# Allegro board 1010403-900-0012_rev-a.brd
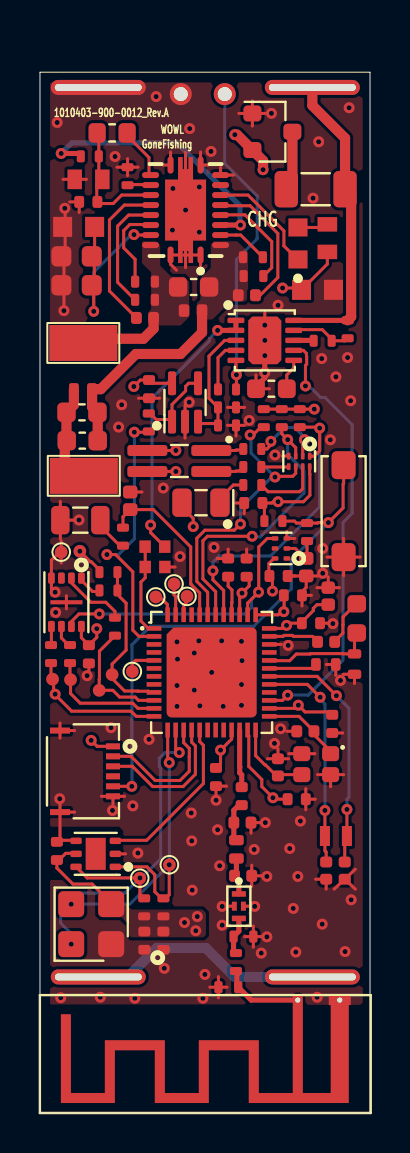
[diagram p0: board, top side]
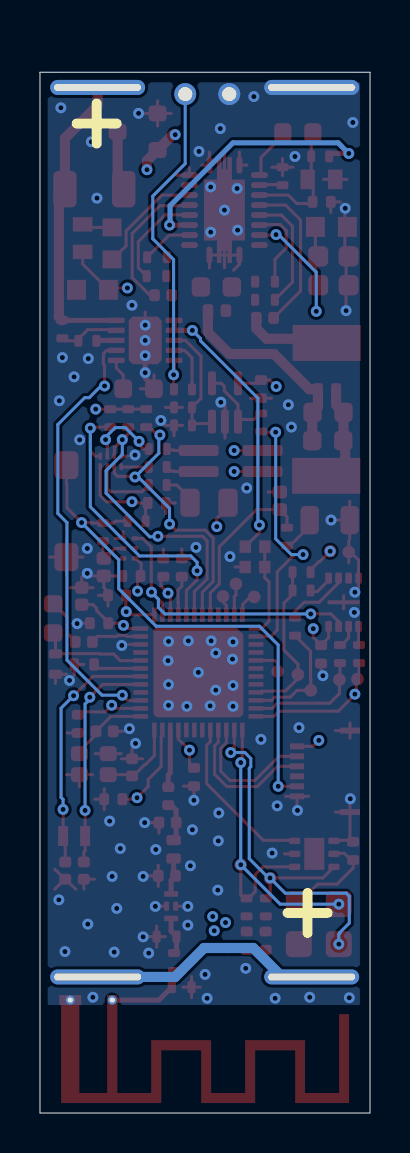
[diagram p1: board, bottom side, seen from below]

Outline 16.51 x 52.07 mm; copper layers: TOP, L2 - GND, L3 - POWER, BOTTOM. Coordinates in mm from the lower left corner of the outline.
Outline path: 0,52.07 0,0 16.51,0 16.51,52.07 0,52.07

## Design rules (mm)
constraint set DEFAULT: min track width 0.152

## Placement (name value [footprint] x y rotation side)
ANT1  Antenna_AN043  [PCBANTENNA_AN043]  8.27 3.2 180 top
B1  HHR70AAAB8T  [PANASONIC_HHR70AAAB8T]  13.62 29.06 90 bottom
B2  HHR70AAAB8T  [PANASONIC_HHR70AAAB8T]  2.92 29.06 270 bottom
C1  0.1uF  [CAPC100X50X55L20N]  0.85 13.11 90 top
C2  10uF  [CAPC100X50X90L25N]  13.32 27.31 270 top
C3  0.1uF  [CAPC100X50X55L20N]  11.93 26.87 0 top
C4  0.1uF  [CAPC100X50X55L20N]  6.17 8.62 270 top
C5  0.1uF  [CAPC100X50X55L20N]  12.65 25.9 0 top
C6  4.7uF  [CAPC100X50X80L25N]  14.42 25.86 90 top
C7  0.1uF  [CAPC100X50X55L20N]  8.8 16.81 270 top
C8  0.1uF  [CAPC100X50X55L20N]  14.62 19.47 270 top
C9  4.7uF  [CAPC102X52X65L15N]  15.73 22.46 270 top
C10  0.1uF  [CAPC100X50X55L20N]  2.45 22.95 270 top
C11  10uF  [CAPC100X50X90L25N]  4.51 30.63 90 top
C12  0.1uF  [CAPC100X50X55L20N]  10.34 27.28 270 top
C13  0.1uF  [CAPC100X50X55L20N]  9.41 27.29 90 top
C14  0.1uF  [CAPC100X50X55L20N]  12.84 15.7 0 top
C15  0.1uF  [CAPC100X50X55L20N]  13.55 24.51 180 top
C16  3.4pF  [CAPC100X50X55L22N]  10.09 15.85 270 top
C17  0.22uF  [CAPC100X50X60L15N]  14.3 22.44 0 top
C18  1.2pF  [CAPC100X50X55L25N]  10.13 14.53 0 top
C19  0.5pF  [CAPC100X50X55L25N]  10.16 11.87 0 top
C20  DNP  [CAPC100X50X55L15N]  10.18 8.83 0 top
C21  DNP  [CAPC100X50X55L15N]  9.42 6.3 180 top
C22  22nF  [CAPC100X50X55L25N]  10.35 40.91 0 top
C23  12pF  [CAPC100X50X55L25N]  13.28 19.1 180 top
C24  12pF  [CAPC100X50X55L25N]  11.9 17.29 90 top
C25  22nF  [CAPC100X50X55L25N]  5.25 39.78 180 top
C26  0.47uF  [CAPC100X50X55L15N]  10.68 41.87 0 top
C27  12pF  [CAPC100X50X55L25N]  15.25 12.13 90 top
C28  12pF  [CAPC100X50X55L25N]  14.32 12.13 90 top
C32  15nF  [CAPC160X80X90L35N]  11.58 36.23 180 top
C40  0.1uF  [CAPC100X50X55L20N]  5.45 36.22 90 top
C41  1uF  [CAPC1608X94N]  13.88 41.18 0 top
C42  0.1uF  [CAPC100X50X55L20N]  5.22 8.62 270 top
C43  0.1uF  [CAPC100X50X55L20N]  10.67 30.52 0 top
C44  0.47uF  [CAPC100X50X55L15N]  5.25 40.68 180 top
C45  10nF  [CAPC100X50X55L15N]  10.65 42.81 0 top
C46  10nF  [CAPC100X50X55L15N]  5.25 41.59 180 top
C47  68nF  [CAPC160X80X87L35N]  2.1 35.06 0 top
C48  68nF  [CAPC160X80X87L35N]  2.11 33.64 0 top
C49  47nF  [CAPC100X50X55L20N]  2.15 36.21 0 top
C50  1.8nF  [CAPC100X50X56L25N]  7.66 40.14 180 top
C51  100pF  [CAPC160X80X87L35N]  7.69 41.33 180 top
C52  0.1uF  [CAPC1608X94N]  1.93 44.33 180 top
C53  10uF  [CAPC160X80X100L37N]  1.83 41.41 180 top
C54  10uF  [CAPC160X80X100L37N]  1.83 42.86 180 top
C55  0.1uF  [CAPC100X50X55L20N]  2.42 45.58 180 top
D1  Green  [LEDC200X125X120L40N]  8.05 30.53 180 top
D2  Red/Yel  [SUNLED_XZM2CRKCYK55W-8]  6.97 32.62 0 top
D3  GRN  [LEDC1608X80N]  12.91 43.5 90 top
F1  SF-1206SP200M-2  [FUSC320X160X117L51N]  13.79 46.22 0 top
J1  503480-0600  [MOLEX_503480-0600]  0.35 17.09 270 top
L1  3.3nH  [INDC100X60X60L20N]  9.83 13.19 270 top
L2  22nH  [INDC100X50X55L25N]  14.32 23.57 0 top
L3  10uH  [INDC160X80X90L35N]  15.85 24.75 270 top
NOREF  -  []  0 0 0 top
NOREF#2  -  []  16.51 0 90 top
NOREF#3  -  []  0 0 0 top
NOREF#4  -  []  -4.58 17.4 0 top
NOREF#5  -  []  0 0 0 top
Q2  DMP2035U-7  [SOT23-3P91_240X120L53X44]  11.63 49.09 270 top
R1  DNP  [RESC205X125X50L35N]  2.02 29.66 0 top
R2  100K  [RESC100X50X40L25]  11.68 29.61 180 top
R3  4.99K  [RESC100X50X40L25]  13.36 29.06 270 top
R4  4.99K  [RESC100X50X40L25]  4.15 28.84 270 top
R5  140  [RESC1609X50N]  2.43 46.71 0 top
R6  0  [RESC100X50X40L25]  9.8 7.55 270 top
R7  33  [RESC100X50X40L25]  0.55 22.96 90 top
R8  33  [RESC100X50X40L25]  1.5 22.96 90 top
R9  33  [RESC100X50X40L25]  3.75 24.33 90 top
R10  10K  [RESC100X50X40L25]  9.36 35.3 0 top
R11  1M  [RESC100X50X40L25]  3.43 27.06 180 top
R12  33  [RESC100X50X40L25]  3.43 26.14 180 top
R13  DNP  [RESC100X50X40L25]  2.49 47.86 180 top
R14  10K  [RESC100X50X40L25]  4.38 46.87 270 top
R15  357  [RESC155X85X50L30N]  3.61 49.03 180 top
R16  1.5K  [RESC1609X50N]  14.38 43.77 270 top
R17  1M  [RESC1005X40N]  5.76 27.32 180 top
R19  10K  [RESC100X50X40L25]  9.36 34.4 0 top
R20  1M  [RESC1005X40N]  5.75 28.33 0 top
R22  100  [RESC100X50X40L25]  10.62 31.42 180 top
R26  10K  [RESC100X50X40L25]  5.45 34.55 90 top
R30  140K  [RESC100X50X40L25]  15.39 39.21 90 top
R31  100K  [RESC100X50X40L25]  14.14 38.63 0 top
R33  10K  [RESC100X50X40L25]  9.36 36.2 180 top
R34  100  [RESC100X50X40L25]  10.62 32.32 180 top
R35  1M  [RESC100X50X40L25]  13 34.76 270 top
R36  1M  [RESC100X50X40L25]  12.1 34.76 270 top
R37  1M  [RESC100X50X40L25]  11.2 34.76 270 top
R39  100  [RESC100X50X40L25]  10.62 33.22 180 top
R44  4.02K  [RESC100X50X40L25]  5.21 10.29 90 top
R45  4.02K  [RESC100X50X40L25]  6.18 10.29 90 top
RT2  10K  [THRMRB220W45L300T300H950]  8.14 50.98 180 bottom
SW1  MK24-A-3  [STANDEX_MK24-A-3]  15.19 30.11 90 top
TP1  DNP  [TP_C0635]  7.36 25.85 0 top
TP2  DNP  [TP_C0635]  6.7 26.47 0 top
TP3  DNP  [TP_C0635]  5.79 25.82 0 top
TP7  DNP  [TP_C0635]  0.63 21.7 180 top
TP8  DNP  [TP_C0635]  1.53 21.68 180 top
TP9  DNP  [TP_C0635]  2.96 21.15 180 top
TP10  DNP  [TP_C0635]  1.06 28.06 90 top
TP11  DNP  [TP_C0635]  1.99 28.11 270 top
TP12  DNP  [TP_C0635]  3.61 21.93 180 top
TP23  DNP  [TP_C0635]  6.47 12.42 180 top
TP24  DNP  [TP_C0635]  4.99 11.75 0 top
TP27  DNP  [TP_C0635]  4.62 22.09 90 top
TP28  5015  [TP340X180N]  2.19 31.88 180 top
TP29  5015  [TP340X180N]  2.17 38.52 180 top
U1  TMP117AIDRVR  [SON7P65_200X200X80L25X30T160X100N]  2.79 12.97 90 top
U2  MS583730BA01-50  [ICDFN4_330X330X285L130X130]  2.56 9.45 180 top
U3  DLF162500LT-5028A1  [TDK_DLF162500LT-5028A1]  9.95 10.35 270 top
U4  SN74LVC1G07QDRYRQ1  [PSON6P50_145X100X55L30X20N]  12.05 28.24 90 top
U5  BLUENRG-355MT  [QFN49P40_600X600X105L40X21T450N]  8.59 22.04 270 top
U6  MX25R1635FZUIH0  [PSON9P50_200X300X60L40X25T160X20N]  1.32 25.55 180 top
U7  LTC4079EDD#TRPBF  [SON11P50_300X300X80L40X25T238X165N]  11.25 38.65 270 top
U8  BQ51013ARHLR  [QFN50P450X350X100-21N]  7.28 45.17 90 top
U9  LPV521MG/NOPB  [SOT23-5P65_210X110L36X22N]  7.26 35.55 0 top
U10  74LVC3G07GS  [PSON8P35_135X100X35L31X16N]  12.97 32.6 180 top
Y2  32MHz  [OSCCC200X160X46-4NA]  13.82 17.45 180 top
Y4  32.768kHz  [DFN160X100X50-2NA]  14.8 13.86 0 top

## Library data of the parts
ANT1 = Antenna_Shunt
B1 B2 = BATTERY_CELL-1
C1-C28 C32 C40-C55 = CAP
D1 D3 = LED_CA
D2 = LED_BI-Color_RY
F1 = FUSE
J1 = Header_6-Pin_M2
L1-L3 = IND
Q2 = MOSFET_P-CH_GSD
R1-R17 R19 R20 R22 R26 R30 R31 R33-R37 R39 R44 R45 = RES
RT2 = Thermistor
SW1 = Reed_SPST_NO
TP1-TP3 TP7-TP12 TP23 TP24 TP27-TP29 = TESTPOINT
U1 = TMP117AIDRVR
U2 = MS583730BA01-50
U3 = DLF162500LT-5028A1
U4 = Buffer_1X_6P_OD
U5 = BLUENRG-355MT
U6 = MX25R1635FZUIH0
U7 = LTC4079
U8 = BQ51013ARHL
U9 = AMP_1X_5P
U10 = Buffer_3X_8P_OD
Y2 = XTAL1-3_Case2-4
Y4 = XTAL1-2: alternate symbols: (ABS05)

## Footprints (pads in the part's own frame, mm; a bottom-side part is the same pattern mirrored in y, then rotated)
CAPC100X50X55L15N
  rrect 0.41x0.6 smd: 1(-0.495,0) 2(0.495,0)
CAPC100X50X55L20N
  rrect 0.49x0.6 smd: 1(-0.455,0) 2(0.455,0)
CAPC100X50X55L22N
  rrect 0.5x0.6 smd: 1(-0.45,0) 2(0.45,0)
CAPC100X50X55L25N
  rrect 0.54x0.6 smd: 1(-0.43,0) 2(0.43,0)
CAPC100X50X56L25N
  rrect 0.53x0.63 smd: 1(-0.45,0) 2(0.45,0)
CAPC100X50X60L15N
  rrect 0.48x0.63 smd: 1(-0.495,0) 2(0.495,0)
CAPC100X50X80L25N
  rrect 0.62x0.67 smd: 1(-0.425,0) 2(0.425,0)
CAPC100X50X90L25N
  rrect 0.64x0.72 smd: 1(-0.44,0) 2(0.44,0)
CAPC102X52X65L15N
  rrect 0.46x0.67 smd: 1(-0.51,0) 2(0.51,0)
CAPC160X80X87L35N
  rrect 0.92x0.97 smd: 1(-0.775,0) 2(0.775,0)
CAPC160X80X90L35N
  rrect 0.89x0.93 smd: 1(-0.77,0) 2(0.77,0)
CAPC160X80X100L37N
  rrect 1x1.02 smd: 1(-0.76,0) 2(0.76,0)
CAPC1608X94N
  rect 0.95x1 smd: 1(-0.8,0) 2(0.8,0)
DFN160X100X50-2NA
  rect 0.5x1 smd: 1(-0.55,0) 2(0.55,0)
FUSC320X160X117L51N
  rrect 1.17x1.82 smd: 1(-1.47,0) 2(1.47,0)
ICDFN4_330X330X285L130X130
  rrect 1.3x1.3 smd: 1(-1,1) 2(-1,-1) 3(1,-1) 4(1,1)
INDC100X50X55L25N
  rrect 0.54x0.6 smd: 1(-0.43,0) 2(0.43,0)
INDC100X60X60L20N
  rrect 0.51x0.73 smd: 1(-0.46,0) 2(0.46,0)
INDC160X80X90L35N
  rrect 0.87x0.929 smd: 1(-0.73,0) 2(0.73,0)
LEDC200X125X120L40N
  rrect 0.97x1.42 smd: 1(-0.95,0) 2(0.95,0)
LEDC1608X80N
  rect 0.9x0.95 smd: 1(-0.8,0) 2(0.8,0)
MOLEX_503480-0600
  rect 0.3x0.7 smd: 1(-1.25,3.3) 2(-0.75,3.3) 3(-0.25,3.3) 4(0.25,3.3) 5(0.75,3.3) 6(1.25,3.3)
  rect 0.3x1 smd: M1(-2.04,0.65) M2(2.04,0.65)
OSCCC200X160X46-4NA
  rrect 0.85x0.75 smd: 1(-0.72,-0.525) 2(0.72,-0.525) 3(0.72,0.525) 4(-0.72,0.525)
PANASONIC_HHR70AAAB8T
  oval 0.75x4.75 hole 0.35x4.35: 1(22.25,0) 2(-22.25,0)
PCBANTENNA_AN043
  round 0.457 hole 0.254: 1(-6.725,-2.45) 2(-4.625,-2.45)
PSON6P50_145X100X55L30X20N
  rrect 0.22x0.33 smd: 1(-0.5,-0.295) 2(0,-0.295) 3(0.5,-0.295) 4(0.5,0.295) 5(0,0.295) 6(-0.5,0.295)
PSON8P35_135X100X35L31X16N
  rrect 0.18x0.35 smd: 1(-0.525,-0.26)
  rrect 0.18x0.34 smd: 2(-0.175,-0.265) 3(0.175,-0.265) 4(0.525,-0.265) 5(0.525,0.265) 6(0.175,0.265) 7(-0.175,0.265) 8(-0.525,0.265)
PSON9P50_200X300X60L40X25T160X20N
  rrect 0.34x0.56 smd: 1(-0.75,-1.21) 2(-0.25,-1.21) 3(0.25,-1.21) 4(0.75,-1.21) 5(0.75,1.21) 6(0.25,1.21) 7(-0.25,1.21) 8(-0.75,1.21)
  rect 1.6x0.2 smd: 9(0,0)
QFN49P40_600X600X105L40X21T450N
  rect 0.228x0.735 smd: 1(-2.2,-2.882) 2(-1.8,-2.882) 3(-1.4,-2.882) 4(-1,-2.882) 5(-0.6,-2.882) 6(-0.2,-2.882) 7(0.2,-2.882) 8(0.6,-2.882) 9(1,-2.882) 10(1.4,-2.882) 11(1.8,-2.882) 12(2.2,-2.882) 25(2.2,2.882) 26(1.8,2.882) 27(1.4,2.882) 28(1,2.882) 29(0.6,2.882) 30(0.2,2.882) 31(-0.2,2.882) 32(-0.6,2.882) 33(-1,2.882) 34(-1.4,2.882) 35(-1.8,2.882) 36(-2.2,2.882)
  rect 0.735x0.228 smd: 13(2.882,-2.2) 14(2.882,-1.8) 15(2.882,-1.4) 16(2.882,-1) 17(2.882,-0.6) 18(2.882,-0.2) 19(2.882,0.2) 20(2.882,0.6) 21(2.882,1) 22(2.882,1.4) 23(2.882,1.8) 24(2.882,2.2) 37(-2.882,2.2) 38(-2.882,1.8) 39(-2.882,1.4) 40(-2.882,1) 41(-2.882,0.6) 42(-2.882,0.2) 43(-2.882,-0.2) 44(-2.882,-0.6) 45(-2.882,-1) 46(-2.882,-1.4) 47(-2.882,-1.8) 48(-2.882,-2.2)
  custom 4.5x4.5 smd: 49(0,0)
QFN50P450X350X100-21N
  oval 0.85x0.3 smd: 1(-2.25,-0.75) 10(2.25,-0.75) 11(2.25,0.75) 20(-2.25,0.75)
  oval 0.3x0.85 smd: 2(-1.75,-1.75) 3(-1.25,-1.75) 4(-0.75,-1.75) 5(-0.25,-1.75) 6(0.25,-1.75) 7(0.75,-1.75) 8(1.25,-1.75) 9(1.75,-1.75) 12(1.75,1.75) 13(1.25,1.75) 14(0.75,1.75) 15(0.25,1.75) 16(-0.25,1.75) 17(-0.75,1.75) 18(-1.25,1.75) 19(-1.75,1.75)
  custom 5.3x2.05 smd: 21(0,0)
RESC100X50X40L25
  rrect 0.4x0.6 smd: 1(-0.45,0) 2(0.45,0)
RESC155X85X50L30N
  rrect 0.86x0.98 smd: 1(-0.75,0) 2(0.75,0)
RESC205X125X50L35N
  rrect 0.92x1.42 smd: 1(-1,0) 2(1,0)
RESC1005X40N
  rect 0.57x0.62 smd: 1(-0.49,0) 2(0.49,0)
RESC1609X50N
  rect 0.72x0.98 smd: 1(-0.69,0) 2(0.69,0)
SON7P65_200X200X80L25X30T160X100N
  rrect 0.32x0.565 smd: 1(-0.65,-0.982) 2(0,-0.982) 3(0.65,-0.982) 4(0.65,0.982) 5(0,0.982) 6(-0.65,0.982)
  rect 1.6x1 smd: 7(0,0)
SON11P50_300X300X80L40X25T238X165N
  rrect 0.27x0.84 smd: 1(-1,-1.445) 2(-0.5,-1.445) 3(0,-1.445) 4(0.5,-1.445) 5(1,-1.445) 6(1,1.445) 7(0.5,1.445) 8(0,1.445) 9(-0.5,1.445) 10(-1,1.445)
  rrect 2.38x1.65 smd: 11(0,0)
SOT23-3P91_240X120L53X44
  rrect 0.8x0.9 smd: 1(-0.915,-1) 2(0.915,-1) 3(0,1)
SOT23-5P65_210X110L36X22N
  rrect 0.4x1.19 smd: 1(-0.65,-0.96) 2(0,-0.96) 3(0.65,-0.96) 4(0.65,0.96) 5(-0.65,0.96)
STANDEX_MK24-A-3
  rrect 1.4x1.2 smd: 1(-2.3,0) 2(2.3,0)
SUNLED_XZM2CRKCYK55W-8
  rrect 2x0.55 smd: 1(1.6,0.525) 2(-1.6,0.525) 3(1.6,-0.525) 4(-1.6,-0.525)
TDK_DLF162500LT-5028A1
  rect 0.275x0.7 smd: 1(-0.612,0) 3(0.612,0)
  rect 0.45x0.245 smd: 2(0,-0.228) 4(0,0.228)
THRMRB220W45L300T300H950
  round 1.1 hole 0.7: 1(-1.1,0) 2(1.1,0)
TP340X180N
  rect 3.4x1.8 smd: 1(0,0)
TP_C0635
  round 0.635 smd: 1(0,0)

## Nets
GND_POWER: ANT1.1(GND) B2.2 C1.2 C2.2 C3.2 C4.2 C5.2 C6.2 C7.2 C8.2 C9.2 C10.2 C11.2 C12.1 C13.2 C14.2 C15.1 C17.2 C18.2 C19.2 C20.2 C21.2 C23.2 C24.2 C27.1 C28.1 C32.2 C40.1 C41.2 C42.2 C43.1 C52.2 C53.2 C54.2 C55.2 J1.6 J1.M1 J1.M2 Q2.1 R1.1 R5.1 R10.2 R14.1 R17.1 R19.2 RT2.2 SW1.1 TP10.1(TP) U1.2 U1.4 U2.1 U3.2 U3.4 U4.3 U5.34(VSSSD) U5.49 U6.4 U6.9 U7.11 U8.1 U8.9 U8.10 U8.11 U8.20 U8.21 U9.2(V-) U10.4 Y2.2 Y2.4
VBAT: C1.1 C3.1 C4.1 C5.1 C6.1 C7.1 C8.1 C10.1 C12.2 C14.1 C15.2 C40.2 C42.1 C43.2 D1.2 D2.2 D2.4 J1.1 Q2.2(S) R2.2 R11.2 R35.1 R36.1 R37.1 R44.1 R45.1 TP11.1(TP) U1.5(V+) U2.2(VDD) U4.6 U5.21 U5.23 U5.26 U5.36 U5.37 U5.39 U6.8 U9.5 U10.8
VBAT_IN: B1.1(POS) F1.2 R30.2 U7.10
VDDA: C13.1 U5.40
AC1: C22.1 C26.1 C45.1 C47.2 C48.2 C49.2 C50.1 C51.1 U8.2
AC2: C25.1 C44.1 C46.1 C50.2 C51.2 TP29.1(TP) U8.19
ANALOGSPARE1: TP27.1(TP) U5.5
BLE_NRESET: U4.4(Y) U5.38 U6.7
BLE_SWDCLK: J1.3 U5.16
BLE_SWDIO: J1.2 U5.15
BOOT1: C45.2 U8.3
BOOT2: C46.2 U8.17
CLMP1: C26.2 U8.5
CLMP2: C44.2 U8.16
COM1: C22.2 U8.6
COM2: C25.2 U8.15
DEV1: C11.1 R4.1 U5.44
FOD: C55.1 R5.2 R13.1 R15.2 U8.14
ICHG: R26.1 U5.2
ICHG_NOT_BUFFERED: R10.1 R19.1 U7.3 U9.3
ILIM: R15.1 U8.12
LED1: R35.2 U5.41 U10.1
LED2: R36.2 U5.42 U10.3
LED3: R37.2 U5.43 U10.6
LFSPARE2: TP2.1(TP) U5.47
LFSPARE3: TP1.1(TP) U5.46
LFSPARE4: TP3.1(TP) U5.48
MEM_CS: R11.1 R12.1 TP12.1(TP) U5.9
MEM_SCLK: R8.1 TP8.1(TP) U5.11
MEM_SDI: R7.1 TP7.1(TP) U5.12
MEM_SDO: R9.1 TP9.1(TP) U5.10
NCHG: D3.1(C) U8.7
NCHRG: U5.27 U7.7
NRESET: J1.5 R2.1 R3.1 SW1.2
RECT: C52.1 C53.1 C54.1 U8.18
SCL: R45.2 TP23.1(TP) U1.1 U2.3 U5.13
SDA: R44.2 TP24.1(TP) U1.6 U2.4 U5.14
TALERT: U1.3 U5.17
TS-CTRL: R14.2 U8.13(TS-CTRL)
VCAP: C17.1 U5.31
VCHG: C41.1 R13.2 R16.2 R20.2 U7.1 U7.2 U8.4
N15057205: R12.2 U6.1
N15057239: R8.2 U6.6
N15057265: R7.2 U6.5
N15057295: R9.2 U6.2
N15069355: F1.1 Q2.3
N15069411: B1.2 B2.1(POS)
N15070172: R30.1 R31.2 U7.9
N15070236: R31.1 U7.8
N15070276: C32.1 U7.6(TIMER)
N15070284: R33.2 U7.4
N15070288: R33.1 RT2.1(C1) U7.5
N15130755: R26.2 U9.1 U9.4
N15156716: C47.1 C48.1 C49.1 TP28.1(TP)
N15160261: D3.2 R16.1
N15172554: R34.1 U10.5
N15172558: R39.1 U10.2(3Y)
N15173046: D2.3(C-YEL) R34.2
N15173050: D2.1 R39.2
N15197976: D1.1(C) R22.2
N15197980: R22.1 U10.7
N15217382: C2.1 R3.2 U4.2
N15228069: C16.1 U5.22
N15230394: C27.2 U5.30 Y4.2
N15230398: C28.2 U5.29 Y4.1
N15231077: C23.1 U5.25 Y2.1
N15231081: C24.1 U5.24 Y2.3(OUTPUT)
N15253808: C9.1 L3.2 U5.32
N15257122: R17.2 R20.1 U5.1
N15277400: R1.2 R4.2
N15288589: L2.1 U5.35
N15293933: L2.2 L3.1
N15294382: C16.2 C18.1 L1.1
N15294859: C19.1 L1.2 U3.1
N15294866: C20.1 R6.1 U3.3(OUT)
N15294875: ANT1.2 C21.1 R6.2

Pads without a net: J1 4; U1 7; U4 1 5; U5 3 4 6 7 8 18 19 20 28 33 45; U6 3; U8 8

## Via types
v1: diameter 0.546, hole 0.254, TOP to BOTTOM, 152 vias

## Routing (per net, layer and track width the routed paths; a pad name or vN(x,y) marks a point on that pad's centre or on a via; arc(x,y) is an arc through that point)
GND_POWER: length 83.2
  TOP w0.152: 7.28,42.3 v1(7.28,45.17) 7.28,48.05 ; 3.07,15.84 J1.6 ; J1.6 3.65,15.47 ; J1.6 4.23,15.84 ; SW1.1 15.19,28.74 ; SW1.1 14.36,27.81 ; SW1.1 16.02,27.81 ; SW1.1 15.19,26.88 ; v1(0.76,26.06) 0.57,26.24 U6.4 0.57,27.66 0.97,28.06 TP10.1 ; 14.54,16.33 Y2.4 ; Y2.4 15.19,16.93 ; Y2.4 13.88,16.93 ; C3.2 12.73,26.87 12.73,26.87 C2.2 ; 1.02,28.72 R1.1 ; R1.1 1.02,30.6 ; R1.1 1.71,29.66 ; 13.75,17.98 Y2.2 12.44,17.98 ; 8.03,42.27 U8.1 U8.20 6.53,42.46 6.83,42.16 ; C24.2 12.43,17.72 ; C24.2 11.9,18.22 ; C24.2 11.38,17.72 ; J1.M2 1.73,15.05 ; J1.M2 1,13.72 C1.2 1.02,13.57 1.1,13.64 1.78,13.64 U1.4 ; J1.M2 1,15.43 ; 9.37,10.35 U3.2 ; 10.24,8.83 C20.2 ; C20.2 11.11,8.83 ; C20.2 10.67,9.36 ; C20.2 10.67,8.3 ; 11.06,14.53 C18.2 10.56,14 ; 9.41,28.21 C13.2 8.88,27.74 ; 10.52,34.55 10.46,34.6 v1(10.46,34.65) ; 7.26,35.41 U9.2 7.26,33.76 ; 8.02,47.43 U8.10 ; U8.10 8.03,48.08 ; U8.10 8.41,47.42 ; 4.38,46.89 R14.1 ; R14.1 3.85,47.32 ; R14.1 4.38,47.75 ; R14.1 4.91,47.32 ; C21.2 9.36,6.3 ; C21.2 8.49,6.3 ; C21.2 8.93,6.82 ; C21.2 8.93,5.77 ; C14.2 13.77,15.7 ; C14.2 13.3,16.23 ; C14.2 13.3,15.17 ; 1.32,25.88 U6.9 1.32,25.22 ; 12.35,19.1 C23.2 ; U5.34 12.07,23.44 ; 9.38,35.3 R10.2 10.24,35.3 ; C27.1 15.77,11.2 ; C27.1 15.77,12.2 ; C27.1 14.72,11.2 ; 8.8,15.88 C7.2 9.33,16.35 ; C6.2 14.42,26.82 ; C6.2 14.98,26.28 ; C6.2 13.86,26.28 ; C5.2 13.11,26.08 13.32,26.29 C2.2 ; C5.2 13.11,25.37 ; C5.2 13.58,25.9 ; 6.53,48.08 U8.11 6.15,47.42 ; C2.2 13.91,26.87 ; 9.95,50.01 Q2.1 ; Q2.1 11.3,50.01 ; Q2.1 10.63,49.38 ; Q2.1 10.63,50.64 ; C12.1 10.34,28.21 ; C32.2 11.48,36.23 ; J1.M1 1,19.51 ; J1.M1 1.73,19.13 ; J1.M1 1,18.76 ; R17.1 6.76,27.32 ; 15.17,21.95 C9.2 15.73,21.49 ; 14.79,21.9 C17.2 14.33,22.44 ; 5.98,35.76 C40.1 4.93,35.76 ; C8.2 15.15,19.01 ; 1.19,40.13 v1(1.2,40.14) 1.2,41.27 1.07,41.4 C53.2 1.2,41.54 1.2,42.73 C54.2 1.26,43.05 1.26,44.08 1.13,44.21 C52.2 1.26,44.46 1.26,45.24 v1(1.24,45.26) ; 12.12,32.87 U10.4 ; v1(11.25,38.65) 11.25,40.07 ; 12.74,28.74 U4.3 12.35,29.08 ; 9.81,33.87 R19.2 ; R19.2 9.38,34.4 ; R19.2 10.24,34.4 ; 1.06,27.52 TP10.1 ; TP10.1 1.06,28.61 ; 1.96,45.05 C55.2 1.49,45.58 ; 9.69,46.92 U8.9 9.03,47.3 ; 13.79,11.7 C28.1 14.32,11.2 ; U3.4 10.53,10.35 ; U1.2 4.28,12.97 ; 2.33,46.71 R5.1 1.15,46.71 ; 10.59,11.34 C19.2 ; C19.2 10.59,12.4 ; C19.2 11.09,11.87 ; 2.45,22.02 C10.2 ; C11.2 5.1,31.07 ; 10.81,36.34 10.81,36.93 ; C15.1 14.48,24.51 ; 9.74,30.52 C43.1 10.22,29.99
  TOP w0.254: v1(11.25,37.89) v1(11.25,37.04) 11.25,36.78 10.81,36.34 C32.2
  vias: v1(0.78,25.05) v1(0.86,49.56) v1(0.99,15.72) v1(1.04,5.77) v1(1.95,29.67) v1(2.36,21.88) v1(3.02,5.79) v1(3.55,19.28) v1(3.63,15.14) v1(3.76,47.85) v1(3.93,34.32) v1(4.09,35.43) v1(4.64,15.37) v1(4.75,5.74) v1(4.9,13) v1(5.46,18.69) v1(5.81,50.85) v1(6.17,31.27) v1(6.22,7.24) v1(6.63,44.17) v1(6.65,46.25) v1(6.85,23.57) v1(6.88,22.71) v1(6.85,21.39) v1(6.85,20.35) v1(7.01,27.84) v1(7.49,49.25) v1(7.46,35.56) v1(7.57,15.01) v1(7.59,13.61) v1(7.62,11.15) v1(7.72,23.01) v1(7.72,21.16) v1(7.97,46.33) v1(7.97,44.07) v1(7.95,23.62) v1(8,20.37) v1(8.15,5.74) v1(8.25,6.93) v1(8.56,48.11) v1(8.59,22.04) v1(8.71,28.3) v1(8.81,15.65) v1(8.89,14.17) v1(8.99,12.37) v1(9.09,23.62) v1(9.11,10.34) v1(9.11,9.4) v1(9.17,20.35) v1(10.08,23.6) v1(10.11,22.63) v1(10.08,21.44) v1(10.08,20.4) v1(10.71,13.18) v1(10.74,10.34) v1(11.07,8) v1(11.25,39.42) v1(11.27,14.53) v1(11.35,11.84) v1(11.35,8.81) v1(11.58,50.01) v1(11.73,18.49) v1(11.76,32.92) v1(11.91,40.41) v1(12.04,19.23) v1(12.42,23.39) v1(12.49,13.23) v1(12.67,10.24) v1(12.8,8.05) v1(12.9,11.84) v1(13.03,14.61) v1(13.66,45.77) v1(13.94,48.59) v1(13.86,5.79) v1(14.09,37.74) v1(14.14,28.24) v1(14.14,27) v1(14.12,9.45) v1(14.52,33.68) v1(14.65,24.49) v1(14.8,36.83) v1(15.03,21.64) v1(15.26,8.08) v1(15.39,37.8) v1(15.46,50.29) v1(15.54,35.64) v1(15.57,10.67)
VBAT: length 47
  TOP w0.152: U1.5 1.78,12.99 1.29,12.99 0.95,12.66 C1.1 0.85,12.25 1.65,11.46 2.61,11.46 3.13,10.94 3.13,10.15 3.36,10.15 3.56,10.35 U2.2 ; U5.23 10.39,18.92 10.45,18.86 10.44,17.34 11.1,16.69 11.1,16.33 v1(11.65,15.77) 11.73,15.7 C14.1 ; 11.45,26.87 11.63,26.69 v1(11.63,26.11) ; 11.45,26.87 C3.1 ; 11.45,26.87 11.45,26.87 11.45,27.49 11.7,27.74 U4.6 ; C8.1 14.47,20.07 13.26,20.07 v1(12.92,20.4) 12.91,20.4 12.75,20.24 11.84,20.24 U5.26 ; C12.2 10.47,26.7 10.47,26.37 v1(10.11,26.01) 10.11,25.87 9.99,25.75 U5.39 ; v1(2.56,18.64) 2.86,18.34 J1.1 ; R2.2 11.23,30.42 C43.2 11.6,30.52 11.63,30.55 11.64,30.55 11.68,30.58 v1(11.91,30.58) 13.18,30.58 13.5,30.91 13.5,31.96 13.49,31.97 U10.8 ; v1(13.72,35.21) 13.7,35.24 13.55,35.24 13.53,35.21 R35.1 R36.1 R37.1 ; U9.5 5.62,36.51 C40.2 5.02,36.67 v1(4.7,36.35) ; C5.1 12.21,25.88 12.21,25.1 v1(12.2,25.08) 12.13,25.02 12.01,25.02 11.92,24.93 U5.37 ; D2.2 6.6,33.15 6.63,33.17 6.77,33.17 v1(6.8,33.15) ; D1.2 7.1,30.31 7.67,29.74 v1(7.67,29.34) ; v1(6.8,32.1) 6.77,32.12 6.63,32.12 6.6,32.1 D2.4 ; v1(2.84,24.23) 2.84,23.8 C10.1 2.07,23.78 U6.8 ; U5.36 12.16,24.24 12.32,24.4 v1(12.33,24.4) 12.4,24.4 12.51,24.51 C15.2 13.1,24.56 13.67,25.13 13.67,25.25 13.86,25.43 C6.1 ; U5.21 9.59,18.95 9.59,18.71 v1(9.03,18.15) 9.03,17.49 C7.1 ; v1(1.99,28.11) 2.52,27.58 2.57,27.58 2.97,27.17 R11.2
  TOP w0.508: v1(9.75,48.95) 9.86,48.95 Q2.2 11.16,47.65 v1(11.16,47.19)
  vias: v1(7.23,9.53) v1(7.79,9.12) v1(7.87,9.83)
VBAT_IN: length 15.2
  TOP w0.254: R30.2 15.39,39.65 U7.10
  TOP w0.508: R30.2 15.57,39.83 15.57,45.91 F1.2 15.26,48.77 13.62,50.4 B1.1
VDDA: length 2
  TOP w0.152: C13.1 9.41,26.36 9.6,26.17 9.6,25.54 9.59,25.52 U5.40
AC1: length 10.5
  TOP w0.508: C48.2 2.89,35.04 C47.2 2.61,35.32 C49.2 3.04,36.21 4.8,37.97 7.03,37.97 8.11,39.05 C50.1
AC2: length 4.3
  TOP w0.508: C25.1 5.68,39.24 5.18,38.73 2.38,38.73 TP29.1
ANALOGSPARE1: length 1.6
  TOP w0.152: U5.5 4.77,22.64 4.62,22.49 TP27.1
BLE_NRESET: length 15.1
  TOP w0.152: U4.4 11.37,28.74 10.94,28.32 10.94,26.07 v1(10.93,26.06) 10.39,25.52 10.39,25.5 10.39,25.49 U5.38 ; U6.7 1.57,24.59 1.95,24.97 v1(2.97,24.97)
  BOTTOM w0.152: v1(10.93,26.06) 10.93,26.05 10.59,25.7 10.59,25.3 10.26,24.97 v1(2.97,24.97)
BLE_SWDCLK: length 7.1
  TOP w0.152: U5.16 7.59,18.56 7.77,18.37 7.77,16.95 7.16,16.33 5.64,16.33 4.62,17.34 J1.3
BLE_SWDIO: length 6.7
  TOP w0.152: J1.2 4.55,17.84 5.76,16.64 7.01,16.64 7.47,17.1 7.47,17.82 7.47,17.83 7.47,18.24 7.19,18.52 U5.15
BOOT1: length 2.6
  TOP w0.152: C45.2 10.04,43.92 9.82,43.92 9.82,43.92 U8.3
BOOT2: length 4.3
  TOP w0.152: C46.2 4.76,42.71 4.19,43.28 4.19,44.15 4.49,44.45 5.51,44.45 U8.17
CLMP1: length 5
  TOP w0.152: C26.2 11.59,42.29 11.59,43.6 10.26,44.93 9.04,44.93 U8.5
CLMP2: length 5.9
  TOP w0.152: U8.16 4.43,44.92 3.88,44.37 3.88,41.56 C44.2
COM1: length 7.1
  TOP w0.152: C22.2 11.01,40.91 11.9,41.8 11.9,44 10.51,45.39 9.07,45.39 U8.6
COM2: length 7.8
  TOP w0.152: U8.15 4.22,45.42 3.48,44.68 3.48,41.12 C25.2
DEV1: length 8.4
  TOP w0.152: R4.1 4.15,29.83 C11.1 5.67,30.19 7.54,28.32 7.54,26.47 7.57,26.44 7.99,26.02 U5.44
FOD: length 6.6
  TOP w0.152: R15.2 2.86,48.96 2.94,48.87 R13.1 2.94,46.89 R5.2 2.84,46.43 2.84,45.61 C55.1 2.95,45.5 3.66,45.5 4.09,45.92 U8.14 5.5,45.89
ICHG: length 13.5
  TOP w0.152: v1(4.72,34.06) 5.41,34.06 R26.1 ; U5.2 4.96,23.84 4.64,24.16 4.64,27.08 3.78,27.94 v1(3.35,27.94)
  BOTTOM w0.152: v1(4.72,34.06) 4.72,28.73 3.93,27.94 v1(3.35,27.94)
ICHG_NOT_BUFFERED: length 6.5
  TOP w0.152: U9.3 8,34.49 8.82,34.49 R19.1 R10.1 ; R10.1 8.45,35.75 8.45,37.87 9.24,38.65 U7.3 ; R10.1 8.86,35.26
ILIM: length 2.6
  TOP w0.152: R15.1 4.44,48.96 4.44,48.82 5.45,47.8 5.45,47.01 U8.12
LED1: length 16
  TOP w0.152: v1(8.65,27.13) 8.65,26.68 9.19,26.14 U5.41 ; R35.2 13.94,34.31 v1(13.99,34.26) 13.99,33.12 13.73,32.86 U10.1
  BOTTOM w0.152: v1(13.99,34.26) 13.99,30.33 11.53,27.87 8.97,27.87 8.65,27.55 v1(8.65,27.13)
LED2: length 14.8
  TOP w0.152: v1(10.61,28.85) 8.38,28.85 8.15,28.63 8.15,26.72 8.79,26.08 U5.42 ; R36.2 12.1,33.98 v1(12.39,33.69) 12.79,33.29 U10.3
  BOTTOM w0.152: 12.44,33.69 v1(12.39,33.69) 12.39,32.94 13.2,32.13 13.2,31.01 11.02,28.83 10.64,28.83 v1(10.61,28.85)
LED3: length 14.6
  TOP w0.152: v1(11.76,31.82) 11.79,31.85 12.64,31.85 12.79,32 U10.6 ; R37.2 11.04,34.31 10.71,33.99 10.64,33.99 10.58,33.92 v1(10.51,33.92) ; v1(10.03,29.46) 9.72,29.16 8.25,29.16 7.84,28.75 7.84,26.59 8.39,26.05 U5.43
  BOTTOM w0.152: v1(10.51,33.92) 10.51,33.86 10.56,33.81 10.56,33.01 11.48,32.1 v1(11.76,31.82) 11.6,31.82 10.03,30.25 v1(10.03,29.46)
LFSPARE2: length 1.6
  TOP w0.152: U5.47 6.79,25.84 6.7,25.92 TP2.1
LFSPARE3: length 1
  TOP w0.152: TP1.1 7.31,25.8 7.31,25.53 7.19,25.4 U5.46
LFSPARE4: length 1.3
  TOP w0.152: U5.48 6.37,24.94 6.37,25.44 6,25.82 TP3.1
MEM_CS: length 8.2
  TOP w0.152: U5.9 5.48,21.04 5.42,21.1 4.9,21.1 4.89,21.11 4.23,21.11 3.61,21.74 TP12.1 3.61,22.46 4.31,23.16 4.31,25.51 3.98,25.84 3.98,26.04 R12.1 R11.1
MEM_SCLK: length 6
  TOP w0.152: R8.1 1.5,21.7 TP8.1 1.53,20.99 2.01,20.5 4.64,20.5 4.9,20.24 5.39,20.24 U5.11
MEM_SDI: length 7.1
  TOP w0.152: R7.1 0.55,21.78 TP7.1 0.63,21.6 0.68,21.55 0.68,21.03 v1(0.76,20.95) 0.76,20.93 1.58,20.1 4.56,20.1 4.82,19.84 U5.12
MEM_SDO: length 6
  TOP w0.152: U5.10 5.39,20.64 4.93,20.64 4.77,20.81 3.99,20.81 3.65,21.15 TP9.1 2.96,21.69 2.98,21.7 2.98,23.11 R9.1
NCHG: length 5.6
  TOP w0.152: U8.7 10.41,45.92 12.2,44.13 12.2,43.38 12.88,42.7 D3.1
NCHRG: length 22
  TOP w0.152: v1(12.39,20.9) 12.13,20.64 U5.27 ; v1(13.28,36.37) 13.28,37.41 13.34,37.47 13.34,37.84 13.33,37.85 13.33,38 13.18,38.15 U7.7
  BOTTOM w0.152: v1(13.28,36.37) 13.46,36.37 14.04,35.79 14.27,35.79 15.62,34.44 15.62,30 15.16,29.54 15.16,22.66 13.41,20.9 v1(12.39,20.9)
NRESET: length 26.8
  TOP w0.152: R2.1 12.73,29.61 12.83,29.51 R3.1 13.89,29.51 13.91,29.54 v1(14.43,29.54) 15.16,30.27 15.16,31.46 15.19,31.48 SW1.2 ; J1.5 v1(4.59,16.34)
  BOTTOM w0.152: v1(4.59,16.34) 4.59,23.42 5.53,24.35 10.7,24.35 12.57,26.23 12.57,27.68 v1(14.43,29.54)
RECT: length 10
  TOP w0.152: C52.1 2.73,43 C54.1 2.72,42.73 2.72,41.54 C53.1 2.59,41.4 2.69,41.3 v1(2.69,40.11) ; U8.18 4.87,43.92 4.84,43.95 v1(4.7,43.95)
  BOTTOM w0.152: v1(2.69,40.11) 2.69,42.06 4.55,43.92 4.68,43.92 v1(4.7,43.95)
SCL: length 17.9
  TOP w0.152: v1(6.47,17.53) 6.39,17.61 U5.13 ; v1(6.47,12.42) 6.47,10.92 6.31,10.77 6.2,10.77 R45.2 6.08,10.74 5.74,11.07 5.74,11.92 5.35,12.32 U1.1
  BOTTOM w0.152: v1(1.56,10.45) 4.49,10.45 v1(6.47,12.42) v1(6.47,17.53)
SDA: length 20.3
  TOP w0.152: v1(6.97,18.03) 6.79,18.21 U5.14 ; U1.6 2.36,11.76 v1(5,11.76) 5,10.95 R44.2
  BOTTOM w0.152: v1(6.97,18.03) 6.26,18.03 5.97,17.74 5.97,17.32 6.04,17.25 6.04,12.73 5.08,11.76 v1(5,11.76) 4.24,11 1.19,11 1.04,10.85 1.04,9.5 1.51,9.03 1.51,9 1.56,8.95 v1(1.56,8.45)
TALERT: length 8.3
  TOP w0.152: U5.17 7.99,18.59 8.17,18.4 8.17,16.48 5.33,13.64 3.8,13.64 U1.3
TS-CTRL: length 1.2
  TOP w0.152: R14.2 4.41,46.45 5.51,46.45 U8.13
VCAP: length 2.4
  TOP w0.152: U5.31 13.61,22.24 C17.1
VCHG: length 31
  TOP w0.152: R20.2 5.53,29.04 v1(5.53,29.41) ; v1(12.14,41.27) 12.99,41.27 C41.1 14.38,42.47 R16.2
  TOP w0.254: U7.1 U7.2 v1(8.89,39.15) ; R13.2 1.9,48.01 v1(1.06,48.01) ; U8.4 v1(10.03,44.42)
  BOTTOM w0.152: 10,44.45 v1(10.03,44.42) 10.03,44.48 ; v1(8.89,39.15) 8.48,38.75 8.48,38.63 5.61,35.76 5.61,29.49 v1(5.53,29.41)
  BOTTOM w0.254: v1(1.06,48.01) 1.6,48.54 6.85,48.54 10,45.39 10,44.45 ; v1(8.89,39.15) 9,39.15
N15057205: length 1.3
  TOP w0.152: R12.2 2.92,26.09 2.63,26.09 2.07,26.65 U6.1
N15057239: length 1.2
  TOP w0.152: R8.2 1.43,23.41 1.07,23.77 U6.6
N15057265: length 0.9
  TOP w0.152: R7.2 0.57,23.43 U6.5
N15057295: length 3.3
  TOP w0.152: R9.2 3.75,25.1 3.29,25.55 2.54,25.55 1.57,26.53 U6.2
N15069355: length 3
  TOP w0.508: Q2.3 12.63,46.52 F1.1
N15069411: length 11.9
  BOTTOM w0.508: 2.92,6.81 4.39,6.81 5.84,8.26 5.89,8.26 5.89,8.26 7.05,8.26 7.05,8.26 8.3,8.26 9.75,6.81 B1.2
N15070172: length 3
  TOP w0.152: U7.9 12.73,39.19 14.12,39.19 14.59,38.72 R31.2 15.27,38.63 R30.1
N15070236: length 1
  TOP w0.254: R31.1 13.67,38.65 U7.8
N15070276: length 1.6
  TOP w0.152: C32.1 12.35,36.93 12.69,37.27 U7.6
N15070284: length 2.6
  TOP w0.152: U7.4 9.27,38.15 8.91,37.79 R33.2
N15070288: length 16.6
  TOP w0.152: U7.5 9.8,36.96 v1(9.83,36.93) 9.83,36.22 R33.1
  TOP w0.254: U7.5 9.81,37.65
  BOTTOM w0.152: v1(9.83,36.93) 9.83,42.7 10.87,43.74 10.87,45.87 9.24,47.5 RT2.1
N15130755: length 4.1
  TOP w0.152: U9.4 7.44,36.51 7.29,36.36 7.29,36.13 6.61,35.45 U9.1 6.5,34.7 5.81,34.7 5.51,35 R26.2
N15156716: length 5.1
  TOP w0.508: TP28.1 1.82,31.88 1.24,32.46 1.24,33.54 C48.1 1.33,33.65 C47.1 1.7,35.43 C49.1
N15160261: length 1.5
  TOP w0.152: D3.2 14.22,44.3 R16.1
N15172554: length 1.5
  TOP w0.152: 11.07,32.42 R34.1 12.42,32.32 U10.5
N15172558: length 3.9
  TOP w0.152: v1(13.23,33.69) 13.23,33.56 13.14,33.48 U10.2 ; v1(11.55,33.6) 11.55,33.42 11.35,33.22 R39.1
  BOTTOM w0.152: v1(11.55,33.6) 12.24,34.29 12.75,34.29 13.23,33.81 v1(13.23,33.69)
N15173046: length 1.7
  TOP w0.152: R34.2 9.97,32.12 9.83,32.12 9.8,32.1 D2.3
N15173050: length 1.6
  TOP w0.152: D2.1 9.8,33.15 9.83,33.17 10.12,33.17 R39.2
N15197976: length 1.7
  TOP w0.152: R22.2 9.67,31.42 9,30.75 D1.1
N15197980: length 3.4
  TOP w0.152: R22.1 11.41,31.08 12.99,31.08 13.14,31.24 U10.7
N15217382: length 2.2
  TOP w0.152: U4.2 12.77,28.24 13.11,27.91 13.11,27.78 ; 13.11,27.78 13.36,28.04 R3.2 ; 13.11,27.78 13.14,27.75 C2.1
N15228069: length 2.9
  TOP w0.254: U5.22 9.99,17.32 9.99,17.31 9.99,17.02 10.09,16.92 C16.1
N15230394: length 12.4
  TOP w0.152: C27.2 15.25,13.75 Y4.2 v1(15.35,15.19) ; U5.30 13.86,21.84 v1(14.83,20.88)
  BOTTOM w0.152: v1(14.83,20.88) 15.46,20.25 15.46,15.79 15.35,15.69 v1(15.35,15.19)
N15230398: length 11.2
  TOP w0.152: U5.29 13.38,21.44 v1(14.02,20.8) ; v1(14.25,15.14) Y4.1 14.25,13.12 14.32,13.06 C28.2
  BOTTOM w0.152: v1(14.02,20.8) 14.02,20.7 14.25,20.46 v1(14.25,15.14)
N15231077: length 4
  TOP w0.152: U5.25 12.96,19.84 C23.1 13.71,18.93 14.54,18.1 Y2.1
N15231081: length 4
  TOP w0.152: Y2.3 11.97,16.93 C24.1 11.84,16.86 11.28,17.42 11.25,17.42 10.79,17.88 U5.24
N15253808: length 5.5
  TOP w0.152: L3.2 15.85,23.82 15.73,23.71 C9.1 15.17,22.97 15.16,22.98 13.54,22.98 13.52,22.96 12.82,22.96 12.49,22.63 11.48,22.63 U5.32
N15257122: length 4.6
  TOP w0.152: R20.1 5.27,28.33 R17.2 5.27,26.78 5.05,26.56 5.05,24.61 5.42,24.24 U5.1
N15277400: length 1.8
  TOP w0.152: R4.2 4.13,28.41 3.97,28.41 3.27,29.11 3.27,29.41 R1.2
N15288589: length 2.6
  TOP w0.152: U5.35 12.16,23.84 12.21,23.9 12.62,23.9 12.68,23.84 13.64,23.84 13.89,23.6 L2.1
N15293933: length 2.4
  TOP w0.152: L2.2 14.75,23.6 15.15,24.01 15.15,24.42 15.16,24.43 15.16,24.82 15.82,25.48 L3.1
N15294382: length 2.1
  TOP w0.254: L1.1 9.7,13.78 C18.1 9.7,15.15 9.95,15.4 C16.2
N15294859: length 1.9
  TOP w0.254: U3.1 9.95,11.65 C19.1 9.83,11.96 L1.2
N15294866: length 1.9
  TOP w0.254: R6.1 9.68,8.12 C20.1 9.95,9.09 U3.3
N15294875: length 4.1
  TOP w0.254: R6.2 9.85,7.06 9.85,6.36 C21.1 10.56,5.65 ANT1.2

## Copper pours and planes (outline as drawn; the poured copper is in the pictures)
GND_POWER on TOP (solid shape): 13.15,1 14.55,1 14.55,5.4 14.45,5.4 14.45,5.9 15.55,5.9 15.55,5.4 15.45,5.4 15.45,0.5 10.45,0.5 10.45,3.14 8.45,3.14 8.45,0.5 5.75,0.5 5.75,3.14 3.75,3.14 3.75,0.5 1.05,0.5 1.05,4.94 1.55,4.94 1.55,1 3.25,1 3.25,3.64 6.25,3.64 6.25,1 7.95,1 7.95,3.64 10.95,3.64 10.95,1 12.65,1 12.65,5.9 13.15,5.9
GND_POWER on TOP: 0.5,51.56 16.15,51.56 16.15,6.58 16.15,6.57 16.15,5.54 16.02,5.41 13.28,5.41 13.25,5.43 0.5,5.43 0.5,11.66 3.91,11.66 4.16,11.91 4.16,14.12 3.96,14.33 0.5,14.33
GND_POWER on BOTTOM: 0.5,51.56 16.13,51.56 16.13,5.4 0.5,5.4
GND_POWER on L2 - GND: 0.5,51.56 16.15,51.56 16.15,5.41 0.5,5.4
VBAT on TOP: 4.21,10.54 4.21,10.92 4.01,11.13 3.15,11.13 2.92,10.9 2.92,9.93 3.04,9.8 4.06,9.8 4.44,9.42 4.44,8.92 4.57,8.79 8.17,8.79 8.3,8.92 8.3,10.01 8.12,10.19 4.57,10.19
VBAT on L3 - POWER: 0.5,7.62 0.5,51.56 16.15,51.56 16.15,7.62
AC1 on TOP: 9.88,43.61 8.71,43.61 8.54,43.45 8.54,42.28 8.02,41.76 8.02,40.69 7.84,40.51 7.84,39.8 7.95,39.7 8.63,39.7 9.52,40.59 10.23,40.59 10.41,40.77 10.41,43.08
AC2 on TOP: 5.1,43.61 5.1,42.52 5.56,42.06 5.56,40.21 5.41,40.06 5.41,39.5 5.51,39.4 7.03,39.4 7.46,39.83 7.46,41.58 7.21,41.83 6.57,41.83 6.02,42.39 6.02,43.41 5.81,43.61
VCHG on L3 - POWER: 9.5,44.98 10.16,44.98 12.54,42.6 12.54,40.94 12.34,40.74 11.4,40.74 9.24,38.58 9.24,38.46 8.56,38.46 8.33,38.68 8.33,39.6 9.5,40.77

## Text on the board
Ref Des/Silkscreen Top: 1010403-900-0012_Rev.A | GoneFishing | WOWL | CHG
XSECTION_CHART: *  SURFACE | * ENIG_TOP MASK | * SOLDERMASK_TOP MASK | L1 TOP CONDUCTOR | *  DIELECTRIC | L2 L2 - GND PLANE | L3 L3 - POWER CONDUCTOR | L4 BOTTOM CONDUCTOR | * SOLDERMASK_BOTTOM MASK | * ENIG_BOTTOM MASK | DESIGN CROSS SECTION CHART | ___________________________ | TOTAL THICKNESS 62.56 MIL | 1-4
User.45: FIGURE | FINISHED_SIZE | 10.0 | 27.559 | 171.26x13.78 | TOLERANCE_DRILL | +3.0/-10.0 | +3.0/-3.0 | +0.0/-0.0 | DRILL CHART: TOP to BOTTOM | ALL UNITS ARE IN MILS | TOLERANCE_TRAVEL | - | PLATED | QTY | 152 | 2 | 4 | 160 | TOTAL HOLES:
